# Altium PCB RPI 3.PcbDoc
Units mm, origin at the board's own origin, x right, y up, seen from the top; angles counter-clockwise.
Board outline 79.75 x 61.5 mm, 2 copper layers (Top Layer, Bottom Layer), stack 1.554 mm thick; 25 components, 41 nets, 131 pads, 15 vias.
Unrouted connection lines stored in the file: 5.
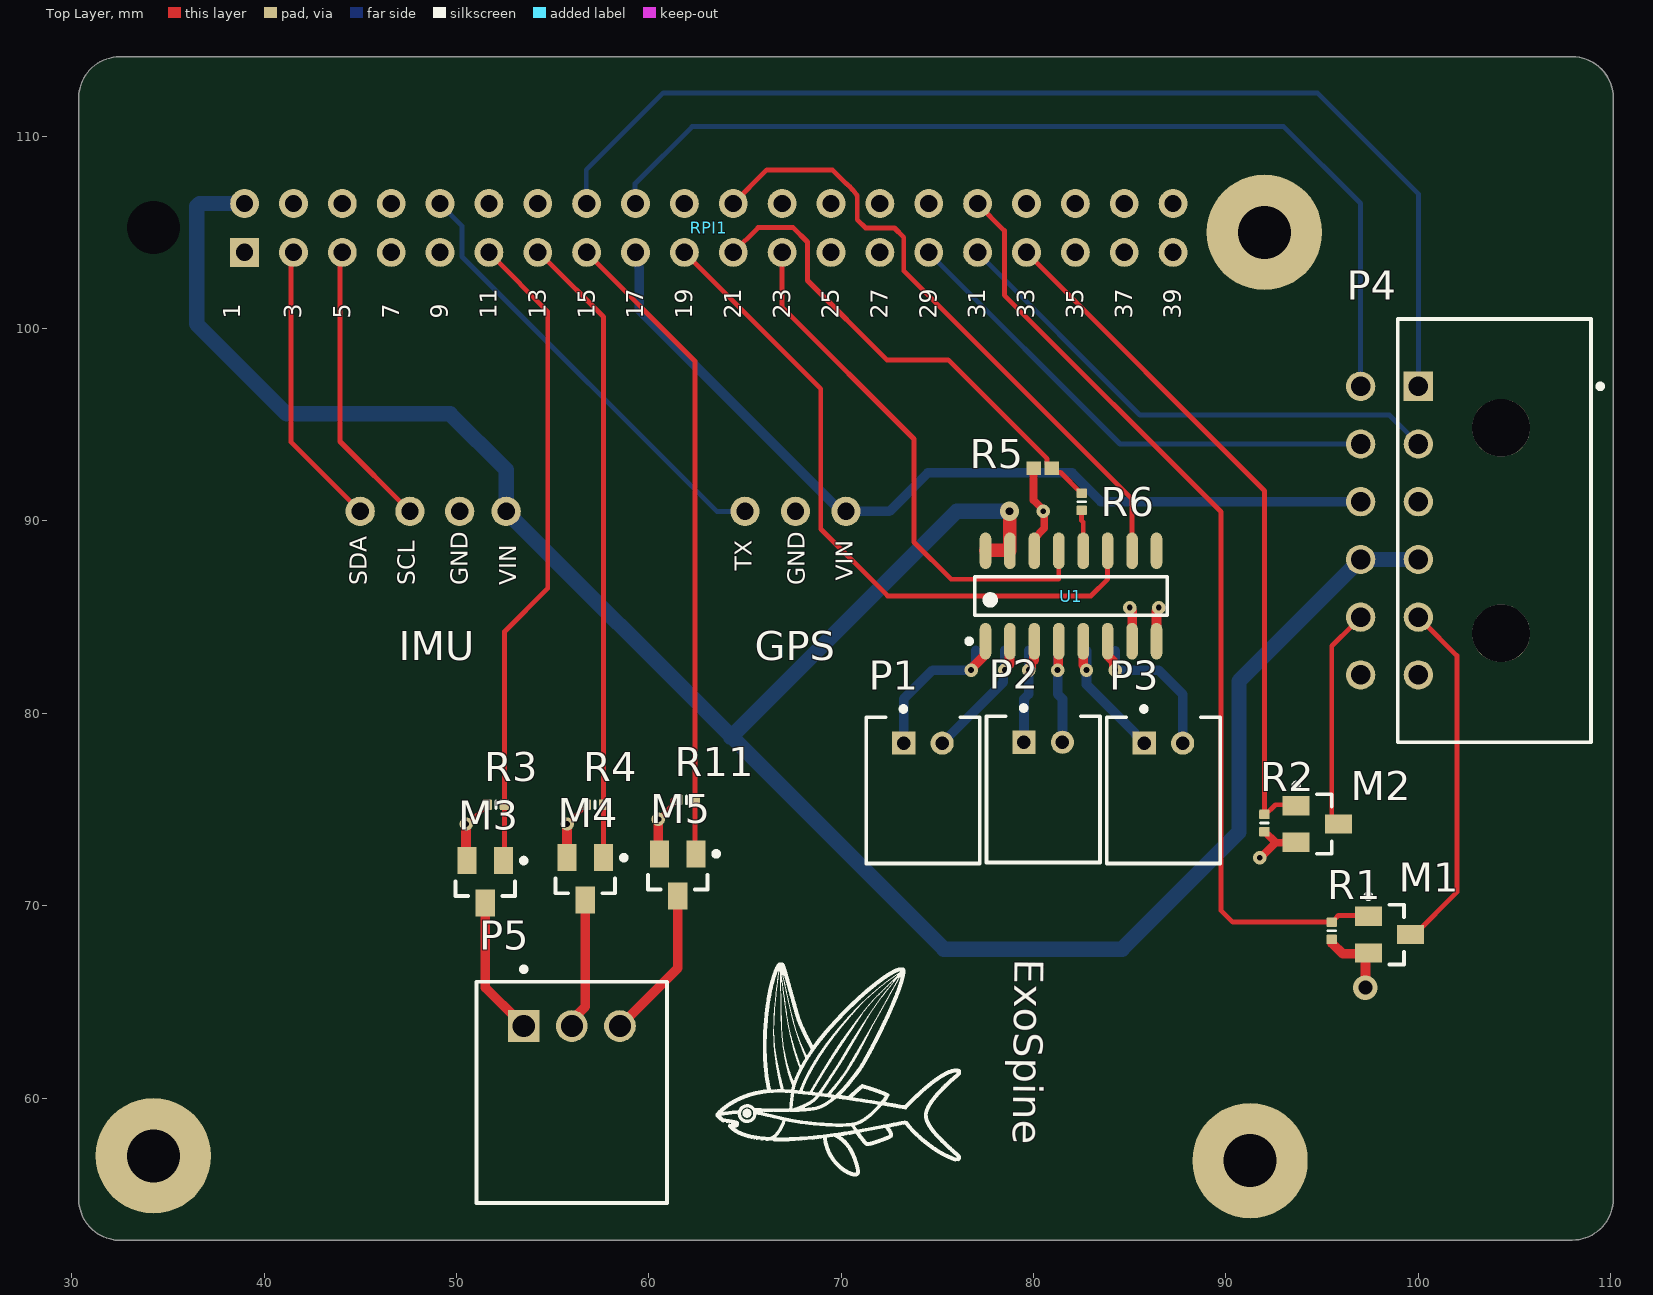
[diagram p0: Top Layer view]
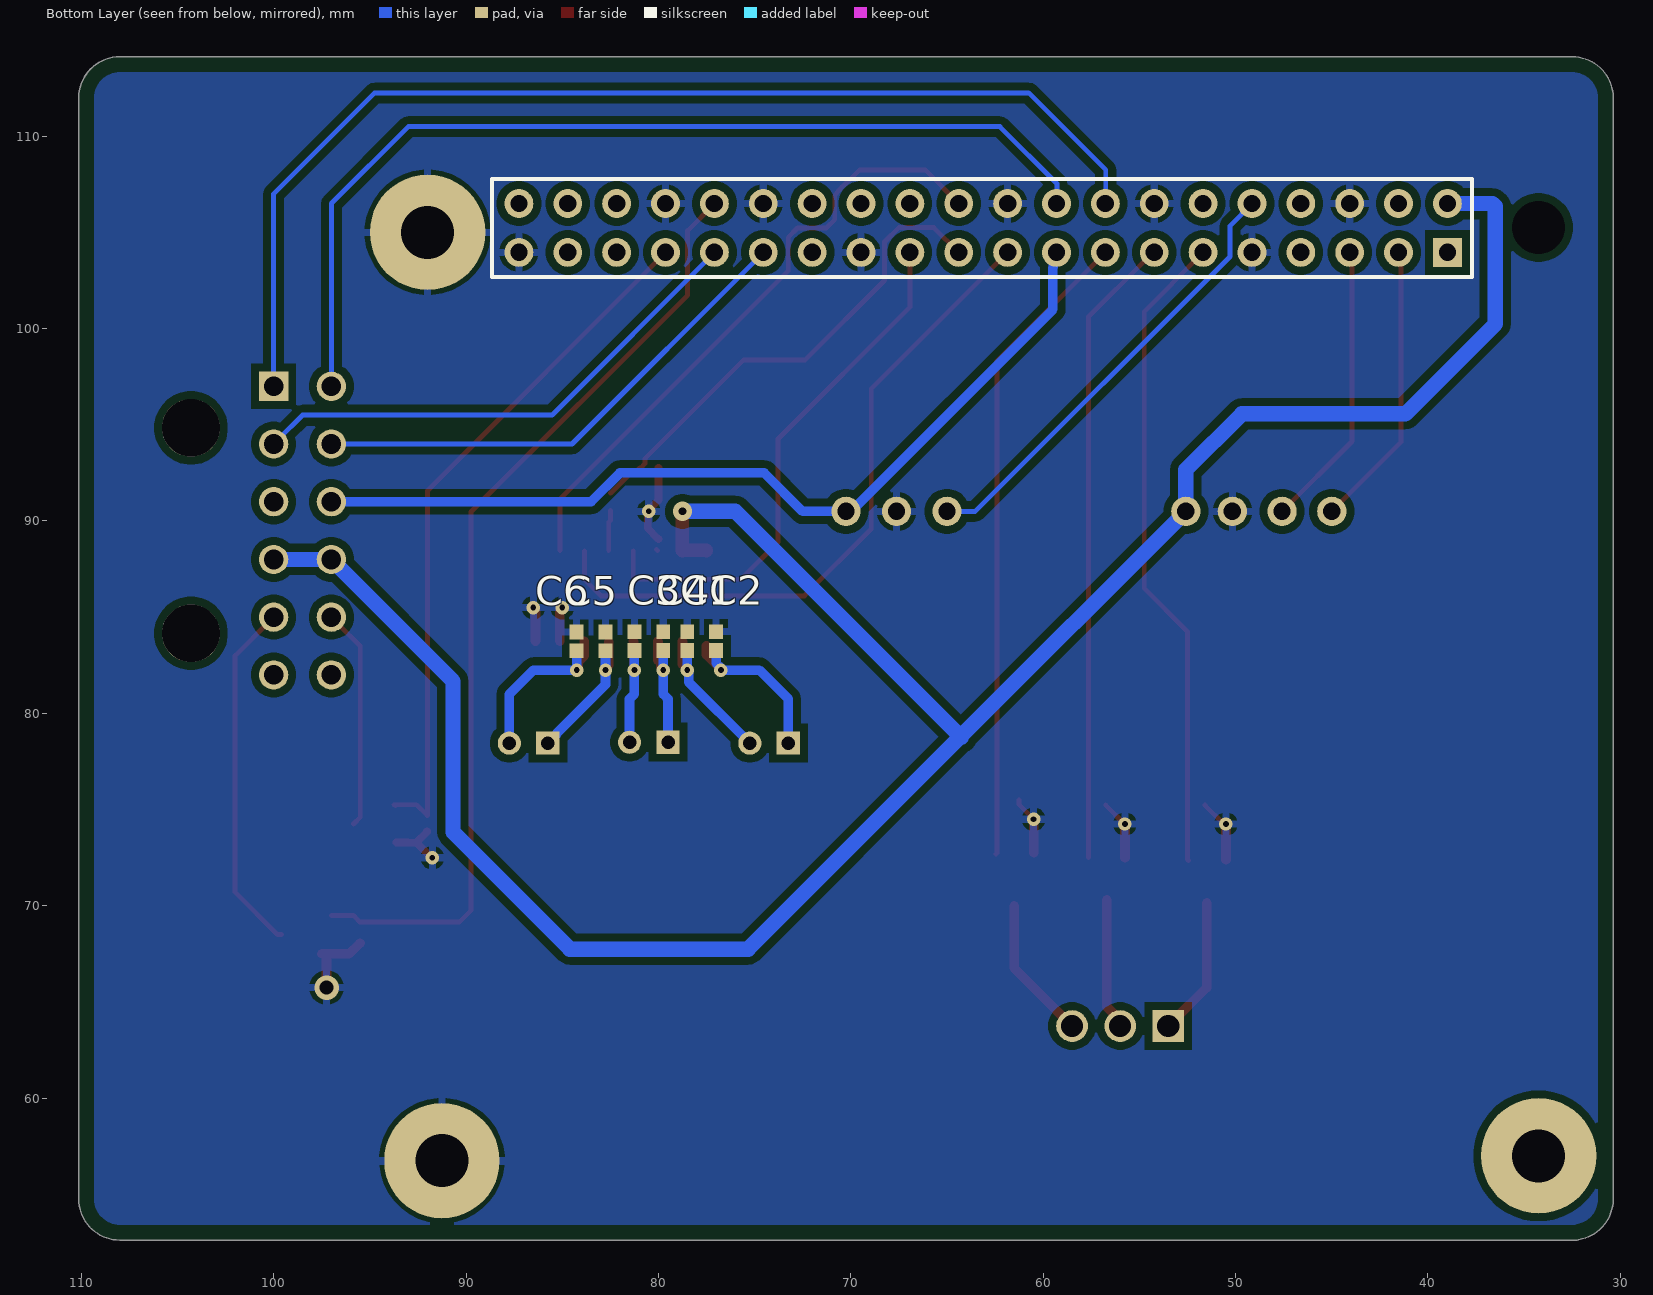
[diagram p1: Bottom Layer view, seen from below]

## Layer stack, top to bottom
Top Solder: solder mask 0.0203, Solder Resist, Dk 3.5
Top Layer: signal copper 0.0533
Dielectric 1: dielectric 1.4478, FR-4, Dk 4.6
Bottom Layer: signal copper 0.0533
Bottom Solder: solder mask 0.0203, Solder Resist, Dk 3.5

## Board outline
30.373,54.749 30.373,108.5 30.373,112 cw(c32.5,112) 32.5,114.127 32.501,114.127 108,114.127 108.001,114.127 cw(c108,112) 110.127,112 110.127,107.5 110.127,54.75 cw(c108,54.75) 108,52.623 32.25,52.623 32.174,52.648 cw(c32.5,54.75)

## Design rules (kind name [scope] priority, off if disabled: settings)
BoardOutlineClearance [All] p1: gap=0.8 ignorepadtopadclearanceinfootprint=FALSE
Clearance Clearance_2 [InNamedPolygon('GND_L02_P002')] p1: gap=0.4 ignorepadtopadclearanceinfootprint=FALSE
Clearance Clearance_1 [InNamedPolygon('GND_L02_P002')] p2: gap=0.254 ignorepadtopadclearanceinfootprint=FALSE except(0: Arc-Hole Track-Hole SMDPad-Hole THPad-Hole Via-Hole Fill-Hole Poly-Hole Region-Hole Text-Hole)
Clearance [All] p3: gap=0.4 ignorepadtopadclearanceinfootprint=FALSE
PlaneClearance [All] p1: clearance=2
PlaneConnect [All] p1: pad.planeconnectstyle=Relief pad.reliefexpansion=0.508 pad.reliefentries=4 pad.reliefconductorwidth=0.254 pad.reliefairgap=0.254 via.planeconnectstyle=Direct via.reliefexpansion=0.508 via.reliefentries=4 via.reliefconductorwidth=0.254 via.reliefairgap=0.254
PolygonConnect [All] p1: connectstyle=Relief reliefconductorwidth=0.4 reliefentries=4 polygonreliefangle="90 Angle" airgapwidth=0.254
RoutingVias [All] p1: holewidth=0.711 width=1.27 viastyle="Through Hole" minholewidth=0.711 minwidth=1.27 maxholewidth=0.711 maxwidth=1.27
SolderMaskExpansion [All] p1: expansion=0.102 istentingtop=FALSE
UnRoutedNet [All] p1: checkbadconnections=TRUE
Width [All] p1: maxlimit=0.254 minlimit=0.254 preferedwidth=0.254
27 further rules are at their usual default settings.

## Components (designator, comment, footprint, x,y, rotation, side; value= is the part's Value field where it differs from the comment)
C1 "Capacitor 1 uF +/- 10% 6.3 V 1005" CAPC1005X55X25ML5T10 78.5,83.76 r270 bottom value=1µF
C2 "Capacitor 1 uF +/- 10% 6.3 V 1005" CAPC1005X55X25ML5T10 77,83.76 r270 bottom value=1µF
C3 "Capacitor 1 uF +/- 10% 6.3 V 1005" CAPC1005X55X25ML5T10 81.25,83.76 r270 bottom value=1µF
C4 "Capacitor 1 uF +/- 10% 6.3 V 1005" CAPC1005X55X25ML5T10 79.75,83.76 r270 bottom value=1µF
C5 "Capacitor 1 uF +/- 10% 6.3 V 1005" CAPC1005X55X25ML5T10 82.75,83.74 r270 bottom value=1µF
C6 "Capacitor 1 uF +/- 10% 6.3 V 1005" CAPC1005X55X25ML5T10 84.25,83.74 r270 bottom value=1µF
M1 "BSS138" FAIR-SOT23-3_V 98.5,68.5 r0 top
M2 "BSS138" FAIR-SOT23-3_V 94.75,74.25 r0 top
M3 "BSS138" FAIR-SOT23-3_V 51.5,71.25 r270 top
M4 "BSS138" FAIR-SOT23-3_V 56.7,71.4 r270 top
M5 "BSS138" FAIR-SOT23-3_V 61.5,71.6 r270 top
P1 "S2B-PH-K-S(LF)(SN)" JST-S2B-PH-K-S_V 74.25,76 r0 top
P2 "S2B-PH-K-S(LF)(SN)" JST-S2B-PH-K-S_V 80.5,76.05 r0 top
P3 "S2B-PH-K-S(LF)(SN)" JST-S2B-PH-K-S_V 86.75,76 r0 top
P4 "66201221022" 66201221022 103.95,89.5 r90 top
P5 "S3B-XH-A(LF)(SN)" JST-S3B-XH-A(LF)(SN)_V 56,63.75 r0 top
R1 "Resistor 10K  +/-1 % 0402 63 mW" RESC0402(1005)_L 95.5,68.7 r270 top value=10k
R2 "Resistor 10K  +/-1 % 0402 63 mW" RESC0402(1005)_L 92,74.3 r270 top value=10k
R3 "Resistor 10K  +/-1 % 0402 63 mW" RESC0402(1005)_L 52.05,75.25 r180 top value=10k
R4 "Resistor 10K  +/-1 % 0402 63 mW" RESC0402(1005)_L 57.2,75.25 r180 top value=10k
R5 "Resistor 1k +/-5% 0402 63 mW" RESC1005X40X25ML10T10 80.475,92.75 r180 top value=1k
R6 "Resistor 2K2  +/-5 % 0402 63 mW" RESC0402(1005)_L 82.5,91 r270 top value=2.2k
R11 "Resistor 10K  +/-1 % 0402 63 mW" RESC0402(1005)_L 61.95,75.5 r180 top value=10k
RPI1 "RPI GPIO Connector" RPI 63.12,105.23 r180 top
U1 "MCP3008-I/SL" SOIC-SL16_L 81.945,86.1 r90 top

## Footprints (in the part's own frame and the unit in brackets; to place one, negate y for a bottom-side part, rotate by r counter-clockwise, add the part's x,y. Pads: shape width x height; smd on the part's side, far side on the other; paste and mask are expansions set on the pad)
66201221022 [mm] "Dual row Right angle header With plastic peg 12p"
  rect 1.52x1.52 hole 1.02: 1(7.5,3.95)
  round 1.52 hole 1.02: 2(4.5,3.95) 3(1.5,3.95) 4(-1.5,3.95) 5(-4.5,3.95) 6(-7.5,3.95) 7(7.5,6.95) 8(4.5,6.95) 9(1.5,6.95) 10(-1.5,6.95) 11(-4.5,6.95) 12(-7.5,6.95)
  round 3 hole 3 unplated: MH1(-5.34,-0.35) MH2(5.34,-0.35)
  silkscreen extent -11,-5.62 11,5.02, body extent -10.85,-4.95 10.85,7.27, height 8.79
CAPC1005X55X25ML5T10 [mm] "Chip Capacitor, 2-Leads, Body 1.05x0.55mm, IPC Low Density"
  rect 0.76x0.72 smd: 1(-0.49,0) 2(0.49,0)
  body extent -0.53,-0.28 0.53,0.28, height 0.55
FAIR-SOT23-3_V [mm] "SOT23, 3-Leads, Body 3.12x1.5mm, Pitch 0.95mm"
  rect 1.4x1 smd: 1(-1.1,0.95) 2(-1.1,-0.95) 3(1.1,0)
  silkscreen extent -1.22,-1.55 0.75,2.12, body extent -1.35,-1.56 1.35,1.56, height 1.2
JST-S2B-PH-K-S_V [mm] "THD, 2-Leads, Body 7.6x5.9mm, Pitch 2mm"
  rect 1.2x1.2 hole 0.7: 1(-1,2.45)
  round 1.2 hole 0.7: 2(1,2.45)
  silkscreen extent -2.95,-3.8 2.95,4.35, body extent -2.95,-3.8 2.95,3.8, height 4.8
JST-S3B-XH-A(LF)(SN)_V [mm] "Header, 3-Leads, Body 9.9x11.5mm, Pitch 2.5mm"
  rect 1.65x1.65 hole 1.15: 1(-2.5,0)
  round 1.65 hole 1.15: 2(0,0) 3(2.5,0)
  silkscreen extent -4.95,-9.2 4.95,3.08, body extent -4.95,-9.2 4.95,2.3, height 6.15
RESC0402(1005)_L [mm] "Chip Resistor, Body 1.0x0.5mm, IPC High Density"
  rrect25% 0.5x0.55 smd: 1(-0.45,0) 2(0.45,0)
  silkscreen extent 0,-0.2 0,0.2, body extent -0.5,-0.25 0.5,0.25, height 0.3
RESC1005X40X25ML10T10 [mm] "Chip Resistor, 2-Leads, Body 1.1x0.6mm, IPC Low Density"
  rect 0.75x0.7 smd: 1(-0.475,0) 2(0.475,0)
  body extent -0.55,-0.27 0.55,0.28, height 0.4
RPI [mm]
  rect 1.5x1.5 hole 0.9: 1(24.13,1.27)
  round 1.5 hole 0.9: 2(24.13,-1.27) 3(21.59,1.27) 4(21.59,-1.27) 5(19.05,1.27) 6(19.05,-1.27) 7(16.51,1.27) 8(16.51,-1.27) 9(13.97,1.27) 10(13.97,-1.27) 11(11.43,1.27) 12(11.43,-1.27) 13(8.89,1.27) 14(8.89,-1.27) 15(6.35,1.27) 16(6.35,-1.27) 17(3.81,1.27) 18(3.81,-1.27) 19(1.27,1.27) 20(1.27,-1.27) 21(-1.27,1.27) 22(-1.27,-1.27) 23(-3.81,1.27) 24(-3.81,-1.27) 25(-6.35,1.27) 26(-6.35,-1.27) 27(-8.89,1.27) 28(-8.89,-1.27) 29(-11.43,1.27) 30(-11.43,-1.27) 31(-13.97,1.27) 32(-13.97,-1.27) 33(-16.51,1.27) 34(-16.51,-1.27) 35(-19.05,1.27) 36(-19.05,-1.27) 37(-21.59,1.27) 38(-21.59,-1.27) 39(-24.13,1.27) 40(-24.13,-1.27)
  body extent -25.52,-2.63 25.53,2.38, height 8.5
SOIC-SL16_L [mm] "SOIC, 16-Leads, Body 9.9x3.9mm, Pitch 1.27mm, IPC High Density"
  oval 1.9x0.6 smd: 1(-2.35,4.445) 2(-2.35,3.175) 3(-2.35,1.905) 4(-2.35,0.635) 5(-2.35,-0.635) 6(-2.35,-1.905) 7(-2.35,-3.175) 8(-2.35,-4.445) 9(2.35,-4.445) 10(2.35,-3.175) 11(2.35,-1.905) 12(2.35,-0.635) 13(2.35,0.635) 14(2.35,1.905) 15(2.35,3.175) 16(2.35,4.445)
  silkscreen extent -2.47,-5 1,5.42, body extent -2,-5 2,5, height 1.75

## Part data
C1 C2 C3 C4 C5 C6: library part CMP-001-00009-6, "Chip Capacitor, 1 uF, +/- 10%, 6.3 V, 1005 (0402 Metric)", Capacitor Type=Ceramic, Case/Package=0402, Max Operating Temperature=85°C, Min Operating Temperature=-55°C, Tolerance=10%, Voltage Rating=6.3V, Mounting Technology=SM, Pins=2, RoHS Compliant=True
M1 M2 M3 M4 M5: library part CMP-013-00021-4, "N-Channel Logic Level Enhancement Mode Field Effect Transistor, 220 mA, 50 V, -55 to 150 degC, 3-Pin SOT-23, RoHS, Tape and Reel", Case/Package=TO-236-3, Input Capacitance=27pF, Manufacturer=Fairchild, Max Operating Temperature=150°C, Min Operating Temperature=-55°C, Nominal Dual Supply Voltage=50V, Package Description="3-Pin Small Outline Transistor, Body 2.92 x 1.325 mm, Pitch 0.95 mm", Package Quantity=1, Package Reference=SOT23-3, Package Version="Rev. 12, 03/2016", Power=360mW, Resistance=0.7Ohm, Datasheet URL=https://www.fairchildsemi.com/datasheets/BS/BSS138.pdf, Datasheet Version="Rev. C, 10/2005", Elements=1, Mounting Technology=SM, Nominal Vgs=1.3V, Packaging=TapeandReel, Pins=3, Rds On Max=3.5Ohm, RoHS Compliant=True, Typical Rise Time=9ns
P1 P2 P3: library part CMP-002-00030-2, "Male Header, Pitch 2 mm, 1 x 2 Position, Height 4.8 mm, Tail Length 3.4 mm, -25 to 85 degC, RoHS, Bulk", Case/Package=S2B-PH-K-S, Manufacturer="Japan Solderless Terminals", Max Operating Temperature=85°C, Min Operating Temperature=-25°C, Package Description="Male Header, Pitch 2 mm, 1 x 2 Position, Height 4.8 mm, Tail Length 3.4 mm", Connector Type=Header, Datasheet URL=http://www.jst-mfg.com/product/pdf/eng/ePH.pdf, Datasheet Version=Dec-12, Gender=Male, Mounting Technology=SM, Package Reference=S2B-PH-K-S, RoHS Compliant=Unknown
P4: library part CMP-002-00072-1, "THT Male Header WR-MPC3, with Snap-in Plastic Pegs, Right Angled, Dual Row, pitch 3 mm, 12 pins"
P5: library part CMP-002-00033-2, "Male Header, Pitch 2.5 mm, 1 x 3 Position, Height 6.1 mm, Tail Length 3.4 mm, -25 to 85 degC, RoHS, Bulk", Manufacturer=JST, Max Operating Temperature=85°C, Min Operating Temperature=-25°C, Package Description="Male Header, Pitch 2.5 mm, 1 x 3 Position, Height 6.1 mm, Tail Length 3.4 mm", Case/Package=S3B-XH-A(LF)(SN), Connector Type=Header, Datasheet URL=http://www.jst-mfg.com/product/pdf/eng/eXH.pdf, Datasheet Version=May-16, Gender=Male, Manufacturer URL=http://www.jst.com/home2.html, Mounting Technology=TH, Package Reference=S3B-XH-A(LF)(SN), RoHS Compliant=Unknown
R1 R2 R3 R4 R11: library part CMP-009-00149-3, "Chip Resistor, 10 kOhms, +/-1 %, 63 mW, -55 to 125 degC, 0402", Case/Package=0402, Max Operating Temperature=155°C, Min Operating Temperature=-55°C, Power=63mW, Tolerance=1%, Pins=2
R5: library part CMP-009-00013-5, "Chip Resistor, 1 KOhm, +/- 5%, 0.063 W, -55 to 155 degC, 0402 (1005 Metric)", Case/Package=0402, Max Operating Temperature=155°C, Min Operating Temperature=-55°C, Power=63mW, Tolerance=5%, Mounting Technology=SM, Pins=2, RoHS Compliant=True
R6: library part CMP-009-00166-3, "Chip Resistor, 2,2 kOhms, +/-5 %, 63 mW, -55 to 155 degC, 0402", Case/Package=0402, Max Operating Temperature=155°C, Min Operating Temperature=-55°C, Power=63mW, Tolerance=5%, Pins=2
RPI1: library part "rpi connector", "GPIO Header for Raspberry Pi A+/B+/Pi 2/Pi 3 - 2x20", Manufacturer="SparkFun Electronics", Manufacturer Part Number=PRT-14017, Supplier Part Number 1=1568-1462-ND, Accessory Type=Connector, Category="Development Boards, Kits, Programmers", ComponentLink1Description=https://cdn.sparkfun.com/datasheets/Dev/RaspberryPi/12313.pdf, ComponentLink1URL=https://cdn.sparkfun.com/datasheets/Dev/RaspberryPi/12313.pdf, For Use With/Related Products="Raspberry Pi", Nils Minor=author, nilsminor@web.de=mail, Part Status=Active, Pricing 1="1=1.84 (EUR)", RoHS="RoHS Compliant", Stock 1=150, Supplier 1=Digi-Key
U1: library part CMP-0188-00041-2, "2.7V 4-Channel/8-Channel 10-Bit A/D Converters with SPI Serial Interface, 16-Pin SOIC 150mil, Industrial Temperature", Code_IPC=SOIC127P600-16, Code_JEDEC=MS-012-AC, ComponentLink1Description="Manufacturer URL", ComponentLink1URL=http://www.microchip.com/, ComponentLink2Description=Datasheet, ComponentLink2URL=http://ww1.microchip.com/downloads/en/DeviceDoc/21295d.pdf, ComponentLink3Description="Package Specification", ComponentLink3URL=http://www.microchip.com/stellent/groups/techpub_sg/documents/packagingspec/en012702.pdf, DatasheetVersion="revD, Dec-2008", PackageDescription="16-Lead Plastic Small Outline (SL) - Narrow, 3.90mm Body [SOIC]", PackageReference=SOIC-SL16, PackageVersion="revBB, Aug-2009", RevisionNote="URLs added."

## Free pads (board coordinates)
  round 1.524 hole 0.9: 20(47.583,90.5) 20(52.583,90.5) 21(45,90.5) 21(50.167,90.5) 24(65,90.5) 25(67.625,90.5) 26(70.25,90.5)
  round 6 hole 2.75: ""(34.25,57) ""(91.25,56.75) ""(92,105)
  round 0 hole 2.75: ""(34.25,105.25)

## Via types
v1: diameter 0.7, hole 0.3, Top Layer to Bottom Layer, 13 vias
v2: diameter 1, hole 0.4, Top Layer to Bottom Layer, 1 vias
v3: diameter 1.27, hole 0.711, Top Layer to Bottom Layer, 1 vias

## Nets (pads, with @x,y where several pads share a name; then routed paths per layer and width w, separated by ;. In a path a pad name is that pad's centre, name@x,y a point inside that pad or via, vN(x,y) a via of type N, cw(c..) or ccw(c..) an arc to the next point about the centre after c; other vN are vias at no path point)
+3V3: P4.3 P4.9 pad.26 RPI1.1 RPI1.17 | length 46.1
  Bottom Layer w0.5: RPI1.17 59.29,103.96 59.481,103.769 59.481,103.186 59.5,103.167 59.5,101 70,90.5 pad.26 72.5,90.5 74.5,92.5 82,92.5 83.5,91 P4.9@96.75,91
+5V: P4.4 P4.10 pad.20@52.583,90.5 RPI1.2 RPI1.4 U1.15 U1.16 | length 122.6
  Top Layer w0.7: U1.16 77.5,88.468 U1.15@78.77,88.468 ; v2(78.75,90.5) 78.76,90.49 78.76,88.478 U1.15@78.77,88.468 ; U1.15 U1.15@78.77,88.468
  Bottom Layer w0.8: RPI1.2 36.649,106.5 36.5,106.351 36.5,100.25 41.178,95.572 49.678,95.572 52.583,92.667 52.583,90.5 64.292,78.792 75.333,67.75 84.601,67.75 90.679,73.828 90.679,81.679 P4.10 P4.4 ; 64.25,78.75 76,90.5 v2(78.75,90.5)
GND: C1.1 C2.1 C3.1 C4.1 C5.1 C6.1 M1.2 M2.2 M3.2 M4.2 M5.2 pad.21@50.167,90.5 pad.25 pad.@91.25,56.75 pad.@92,105 R1.2 R2.2 R3.2 R4.2 R5.2 R11.2 RPI1.6 RPI1.9 RPI1.14 RPI1.20 RPI1.25 RPI1.30 RPI1.34 RPI1.39 U1.7 U1.8 U1.9 U1.14 | length 22.2
  Top Layer w0.254: M3.2@50.5,72.4 M3.2 ; v1@50.5,74 v1(50.5,74.25) 50.625,74.25 51.6,75.225 R3.2 ; v1(55.75,74.25) 55.775,74.25 56.75,75.225 R4.2 ; M5.2@60.5,72.75 M5.2 ; v1(60.5,74.5) 61.25,75.25 R11.2@61.25,75.5 ; U1.14 U1.14@80.106,88.516
  Top Layer w0.4: U1.14@80,89.06 80.556,89.616 80.556,90.444 v1(80.5,90.5) 80.5,90.581 80,91.081 R5.2 ; v1(91.75,72.5) 91.794,72.5 92.584,73.291 92.025,73.85 R2.2@92.025,73.875 ; 92.75,73.275 M2.2@93,73.275 ; M2.2@93,73.291 93.616,73.291 M2.2@93.625,73.3
  Top Layer w0.5: M3.2@50.5,72.4 v1@50.5,74 ; M4.2 v1(55.75,74.25) ; M5.2@60.5,72.75 v1(60.5,74.5) ; v1(85,85.5) 85,85.446 85.12,85.326 U1.7 ; U1.8@86.39,83.763 86.39,85.336 86.487,85.433 v1@86.487,85.5 ; v3(97.25,65.75) M1.2@97.25,67.5
  other v1: 86.5,85.5
NetC1_2: C1.2 P1.2 U1.2 | length 7.8
  Top Layer w0.5: v1(78.5,82.25) 78.5,82.304 78.751,82.555 78.751,83.731 U1.2
  Bottom Layer w0.5: P1.2@75.25,78.5 75.3,78.5 78.415,81.615 78.415,82.165 v1(78.5,82.25) C1.2
NetC2_2: C2.2 P1.1 U1.1 | length 8.8
  Top Layer w0.5: v1(76.75,82.25) 76.75,82.3 77.5,83.05 U1.1@77.5,83.5
  Bottom Layer w0.5: P1.1@73.25,78.75 73.25,80.75 74.75,82.25 v1(76.75,82.25) 76.75,82.355 77,82.605 77,82.75 C2.2
NetC3_2: C3.2 P2.2 U1.4 | length 6.1
  Top Layer w0.5: v1(81.25,82.25) 81.28,82.28 81.28,83.72 U1.4
  Bottom Layer w0.5: C3.2 v1(81.25,82.25) 81.25,81 81.5,80.75 P2.2@81.5,78.75
NetC4_2: C4.2 P2.1 U1.3 | length 6.5
  Top Layer w0.5: v1(79.75,82.25) 79.75,82.304 79.882,82.436 79.882,82.632 80.021,82.771 80.021,83.731 U1.3
  Bottom Layer w0.5: P2.1 79.5,80.75 79.75,81 v1(79.75,82.25) C4.2
NetC5_2: C5.2 P3.1 U1.5 | length 7.6
  Top Layer w0.5: U1.5@82.58,83.721 82.58,82.512 82.712,82.38 82.712,82.288 v1(82.75,82.25)
  Bottom Layer w0.5: C5.2 v1(82.75,82.25) 82.75,81.5 85.277,78.973 85.277,78.923 85.7,78.5 P3.1@85.75,78.5
NetC6_2: C6.2 P3.2 U1.6 | length 9.2
  Top Layer w0.5: U1.6 83.85,83.006 84.165,82.692 84.165,82.335 v1(84.25,82.25)
  Bottom Layer w0.5: C6.2 v1(84.25,82.25) 86.5,82.25 87.75,81 P3.2@87.75,78.5
NetM1_1: M1.1 R1.1 RPI1.32 | length 49.7
  Top Layer w0.254: RPI1.32 77.07,106.5 78.479,105.091 78.479,101.739 89.75,90.468 89.75,69.75 90.35,69.15 R1.1 95.525,69.15 95.648,69.273 95.648,69.298 95.85,69.5 M1.1@97,69.5
NetM1_3: M1.3 P4.5 | length 18.1
  Top Layer w0.254: M1.3 99.8,68.5 102,70.7 102,83 P4.5@100.25,84.75
NetM2_1: M2.1 R2.1 RPI1.33 | length 36.5
  Top Layer w0.254: RPI1.33 79.61,103.96 92,91.57 R2.1 92,74.7 92.025,74.7 92.575,75.25 93.75,75.25 M2.1
NetM2_3: M2.3 P4.11 | length 11.6
  Top Layer w0.254: M2.3 95.5,74.6 95.5,83.5 96.586,84.587 96.586,85.164 P4.11@96.5,85.25
NetM3_1: M3.1 R3.1 RPI1.11 | length 33.7
  Top Layer w0.254: RPI1.11@51.75,103.75 51.88,103.75 54.75,100.88 54.75,86.5 52.5,84.25 R3.1 52.5,72.4 M3.1
NetM3_3: M3.3 P5.1 | length 6.9
  Top Layer w0.5: M3.3 51.5,65.75 P5.1@53.25,64
NetM4_1: M4.1 R4.1 RPI1.13 | length 32.1
  Top Layer w0.254: RPI1.13@54.75,103.5 57.65,100.6 R4.1 ; M4.1 R4.1@57.65,75.15
NetM4_3: M4.3 P5.2 | length 6.5
  Top Layer w0.5: P5.2@56,64.25 56.194,64.25 56.7,64.756 M4.3
NetM5_1: M5.1 R11.1 RPI1.15 | length 33.6
  Top Layer w0.254: RPI1.15@56.75,104 RPI1.15@56.75,103.96 ; RPI1.15 RPI1.15@56.75,103.96 ; R11.1@62.4,75.4 62.4,72.75 M5.1 ; R11.1 62.4,98.31 RPI1.15@56.75,103.96
NetM5_3: M5.3 P5.3 | length 7.5
  Top Layer w0.5: P5.3 61.5,66.75 M5.3@61.5,70
NetP4_1: P4.1 RPI1.16 | length 58.9
  Bottom Layer w0.254: RPI1.16 56.75,106.5 56.75,108.25 60.75,112.25 94.75,112.25 100,107 P4.1
NetP4_2: P4.2 RPI1.31 | length 27
  Bottom Layer w0.254: RPI1.31 77.07,103.96 85.53,95.5 98.5,95.5 99.75,94.25 P4.2@100,94.25
NetP4_7: P4.7 RPI1.18 | length 51.2
  Bottom Layer w0.254: RPI1.18 59.29,106.5 59.29,107.54 62.25,110.5 93,110.5 97,106.5 P4.7
NetP4_8: P4.8 RPI1.29 | length 26.6
  Bottom Layer w0.254: RPI1.29 74.53,103.96 84.49,94 P4.8
NetR5_1: R5.1 R6.1 RPI1.21 | length 25.6
  Top Layer w0.254: RPI1.21 65.68,105.25 67.5,105.25 68.25,104.5 68.25,102.5 72.375,98.375 75.563,98.375 80.702,93.235 80.702,92.973 80.925,92.75 R5.1 ; R5.1@81,92.725 81.198,92.527 81.398,92.527 82.475,91.45 R6.1
NetR6_2: R6.2 U1.12 | length 2.1
  Top Layer w0.254: R6.2 82.5,90.021 82.58,89.941 U1.12
NetRPI1_3: pad.21@45,90.5 RPI1.3 | length 14.8
  Top Layer w0.254: RPI1.3@41.5,103.75 41.41,103.66 41.41,94.09 pad.21@45,90.5
NetRPI1_5: pad.20@47.583,90.5 RPI1.5 | length 14.8
  Top Layer w0.254: RPI1.5@44,103.75 43.95,103.7 43.95,94.133 pad.20@47.583,90.5
NetRPI1_7: RPI1.7
NetRPI1_8: RPI1.8
NetRPI1_10: pad.24 RPI1.10 | length 23.5
  Bottom Layer w0.254: RPI1.10 49.13,106.5 50.285,105.345 50.285,103.746 63.53,90.5 pad.24
NetRPI1_12: RPI1.12
NetRPI1_19: RPI1.19 U1.11 | length 35.5
  Top Layer w0.254: RPI1.19 68.936,96.874 68.936,89.586 72.415,86.106 82.986,86.106 83.85,86.97 U1.11
NetRPI1_22: RPI1.22 U1.10 | length 33
  Top Layer w0.254: RPI1.22 66.14,108.25 69.546,108.25 70.261,107.535 cw(c69.523,106.492) 70.426,107.395 cw(c67.939,104.908) 70.772,106.994 70.808,106.943 ccw(c71.014,107.092) 70.831,106.916 70.837,106.893 70.837,106.803 70.837,105.663 71.27,105.23 72.77,105.23 73.25,104.75 73.25,103 85.12,91.13 U1.10
NetRPI1_23: RPI1.23 U1.13 | length 27.7
  Top Layer w0.254: RPI1.23 66.93,101.116 73.787,94.259 73.787,88.9 75.717,86.97 81.31,86.97 U1.13
NetRPI1_24: RPI1.24
NetRPI1_26: RPI1.26
NetRPI1_35: RPI1.35
NetRPI1_36: RPI1.36
NetRPI1_37: RPI1.37
NetRPI1_38: RPI1.38
NetRPI1_40: RPI1.40
pads on no net: P4.6 P4.12 P4.MH1 P4.MH2 RPI1.27 RPI1.28
copper on no net: | length 2.2
  Top Layer w0.5: 95.5,68.05 95.525,68.05 96.075,67.5 97.5,67.5

## Polygon pours and split planes (outlines as drawn)
GND on Bottom Layer "GND_L02_P002" (solid, remove dead copper, pour order 2): 30.373,54.749 30.373,108.5 30.373,112 cw(c32.5,112) 32.5,114.127 32.501,114.127 108,114.127 108.001,114.127 cw(c108,112) 110.127,112 110.127,107.5 110.127,54.75 cw(c108,54.75) 108,52.623 32.25,52.623 32.174,52.648 cw(c32.5,54.75)

## Silkscreen, mask and mechanical layers (free items; w line width, h text height)
Top Overlay:
  drawing of 2 lines, arcs and shapes, not listed
  text "1" at 38.765,100.52 h0.89 r90
  text "3" at 41.94,100.52 h0.89 r90
  text "5" at 44.48,100.52 h0.89 r90
  text "7" at 47.02,100.52 h0.89 r90
  text "9" at 49.56,100.52 h0.89 r90
  text "11" at 52.1,100.52 h0.89 r90
  text "13" at 54.64,100.52 h0.89 r90
  text "15" at 57.18,100.52 h0.89 r90
  text "17" at 59.72,100.52 h0.89 r90
  text "19" at 62.26,100.52 h0.89 r90
  text "21" at 64.8,100.52 h0.89 r90
  text "23" at 67.34,100.52 h0.89 r90
  text "25" at 69.88,100.52 h0.89 r90
  text "27" at 72.42,100.52 h0.89 r90
  text "29" at 74.96,100.52 h0.89 r90
  text "31" at 77.5,100.52 h0.89 r90
  text "33" at 80.04,100.52 h0.89 r90
  text "35" at 82.58,100.52 h0.89 r90
  text "37" at 85.12,100.52 h0.89 r90
  text "39" at 87.66,100.52 h0.89 r90
  text "TX" at 65.348,87.402 h0.89 r90
  text "VIN" at 70.598,86.902 h0.89 r90
  text "SDA" at 45.348,86.652 h0.89 r90
  text "SCL" at 47.848,86.652 h0.89 r90
  text "GND" at 50.598,86.652 h0.89 r90
  text "VIN" at 53.098,86.652 h0.89 r90
  text "GND" at 68.098,86.652 h0.89 r90
  text "IMU" at 47.004,82.754 h1.52
  text "GPS" at 65.504,82.754 h1.52
  text "ExoSpine" at 79.009,67.238 h1.52 r269.42
Mechanical 1:
  lines w0.254: 30.5,108 30.5,108.264 ; 32.25,52.75 108,52.75 ccw(c108,54.75) 110,54.75 110,107.5 ; 32.5,52.75 cw(c32.5,54.75) 30.5,54.75 30.5,108.5 30.5,112 cw(c32.5,112) 32.5,114 108,114 cw(c108,112) 110,112 110,106.5